# Altium PCB Mach_trai_tim.PcbDoc
Units mil, origin at the board's own origin, x right, y up, seen from the top; angles counter-clockwise.
Board outline 2455 x 2435 mil, 2 copper layers (Top Layer, Bottom Layer); 43 components, 40 nets, 123 pads, 10 vias.
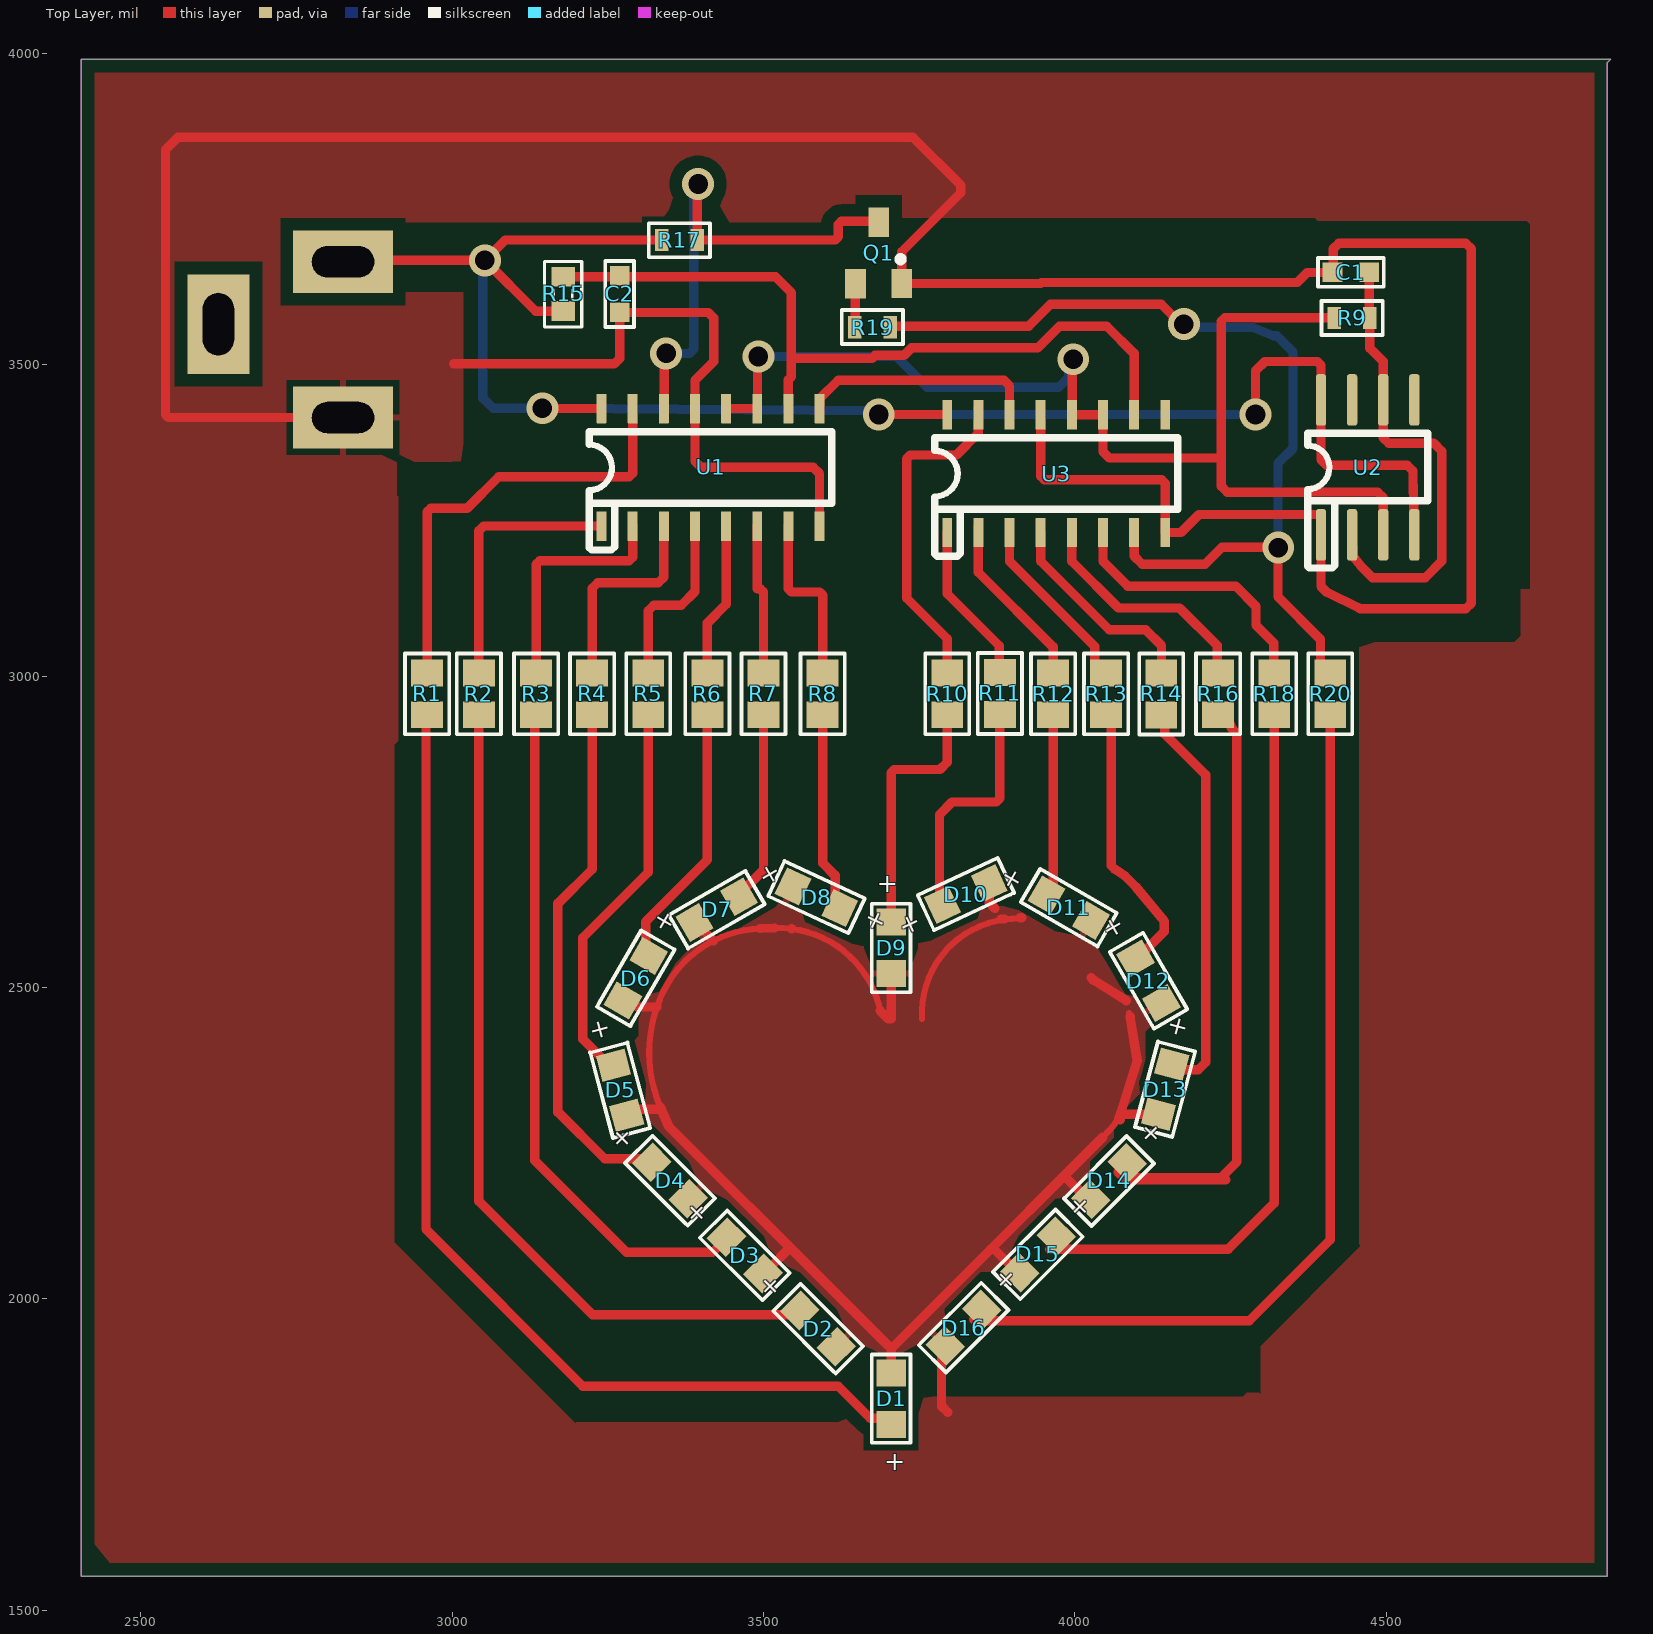
[diagram p0: Top Layer view]
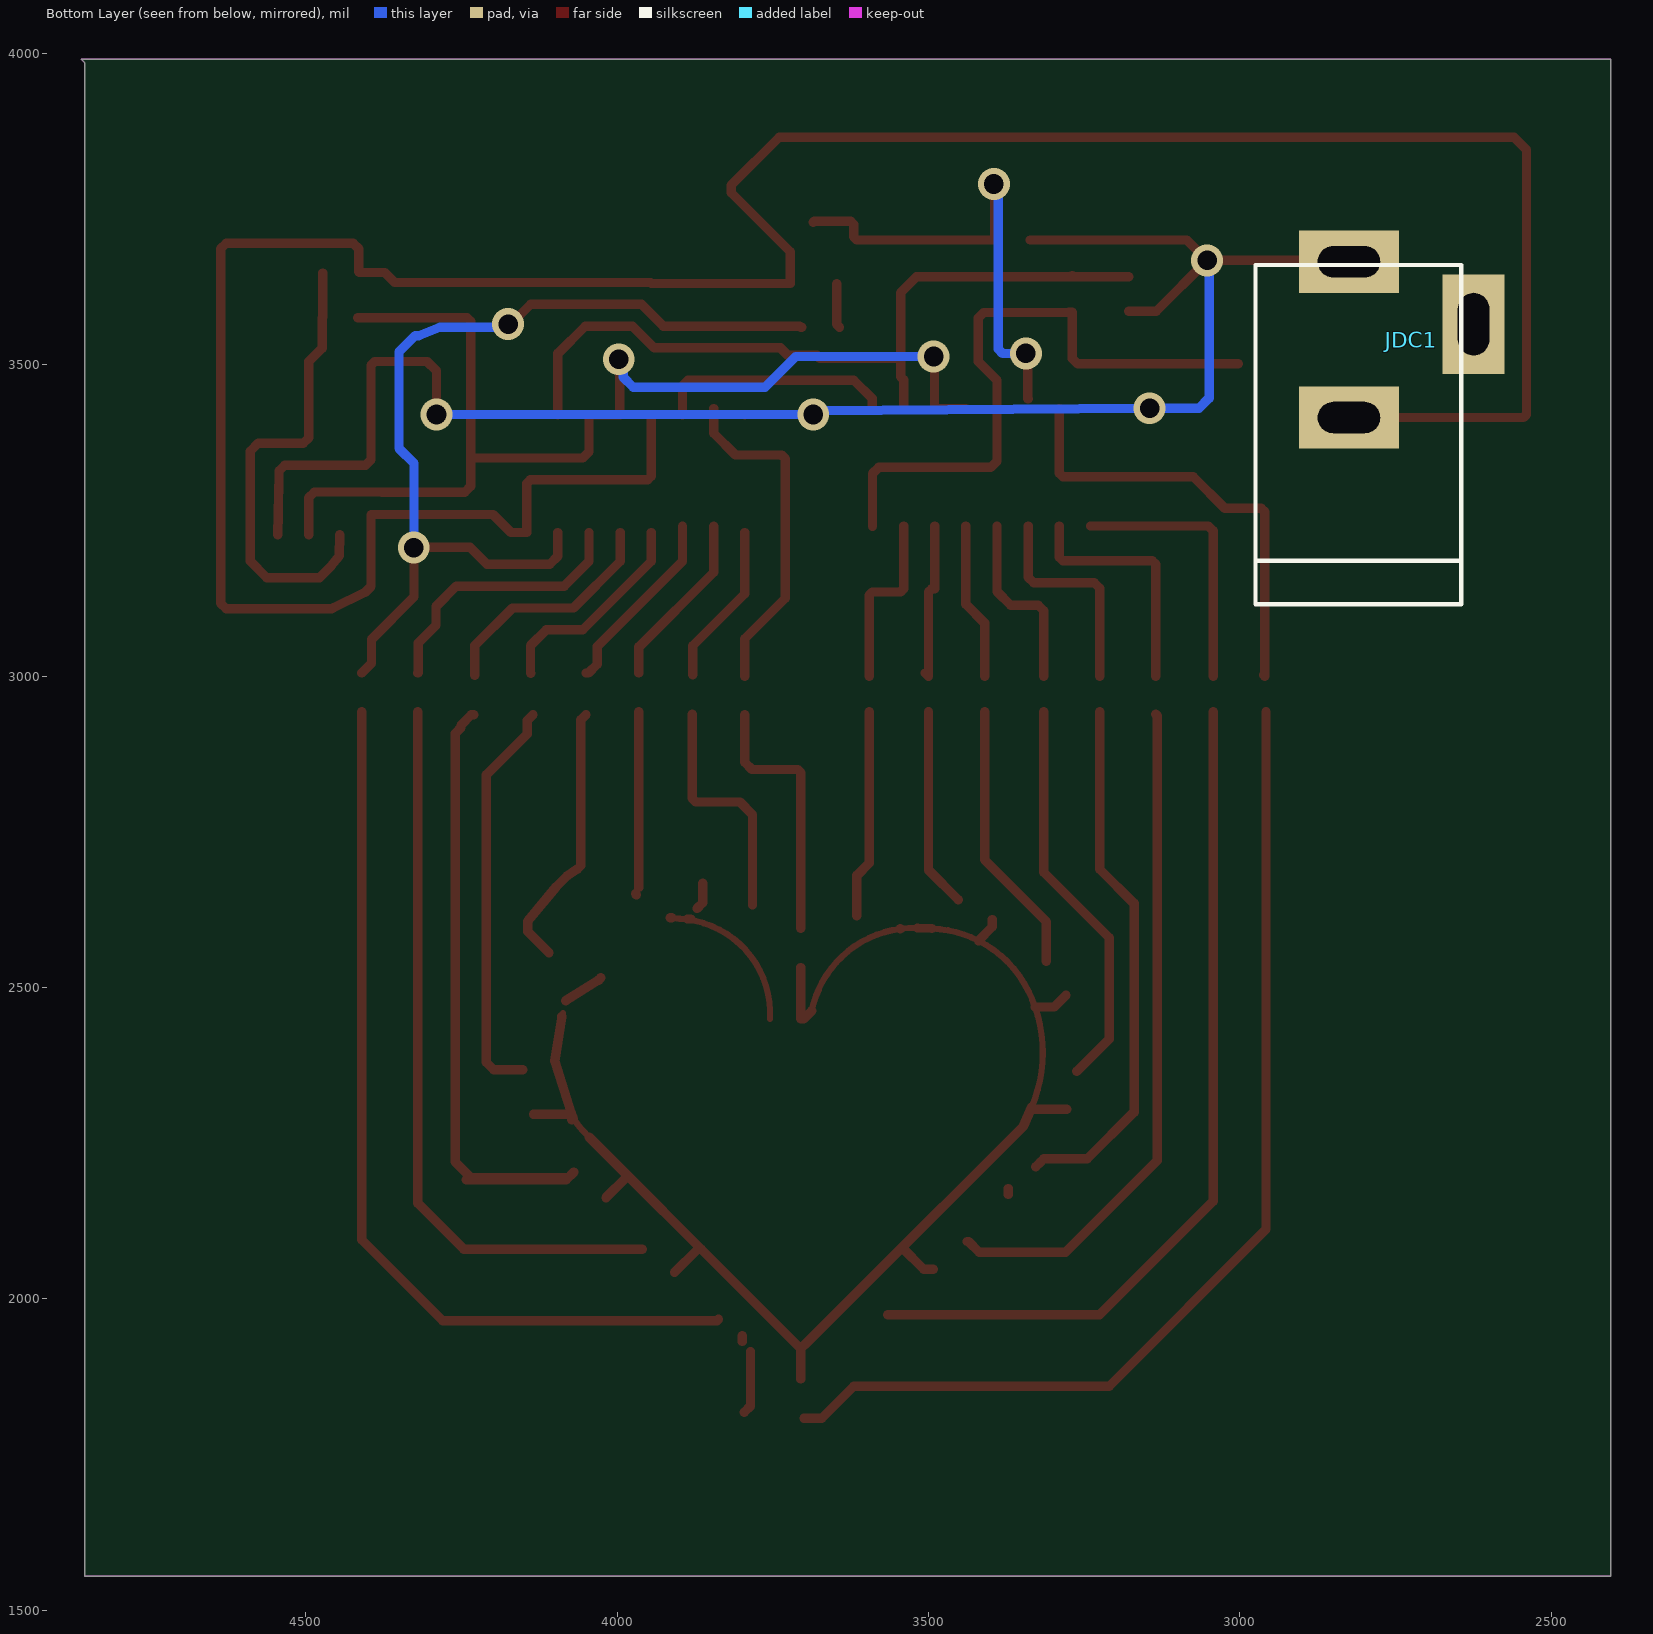
[diagram p1: Bottom Layer view, seen from below]
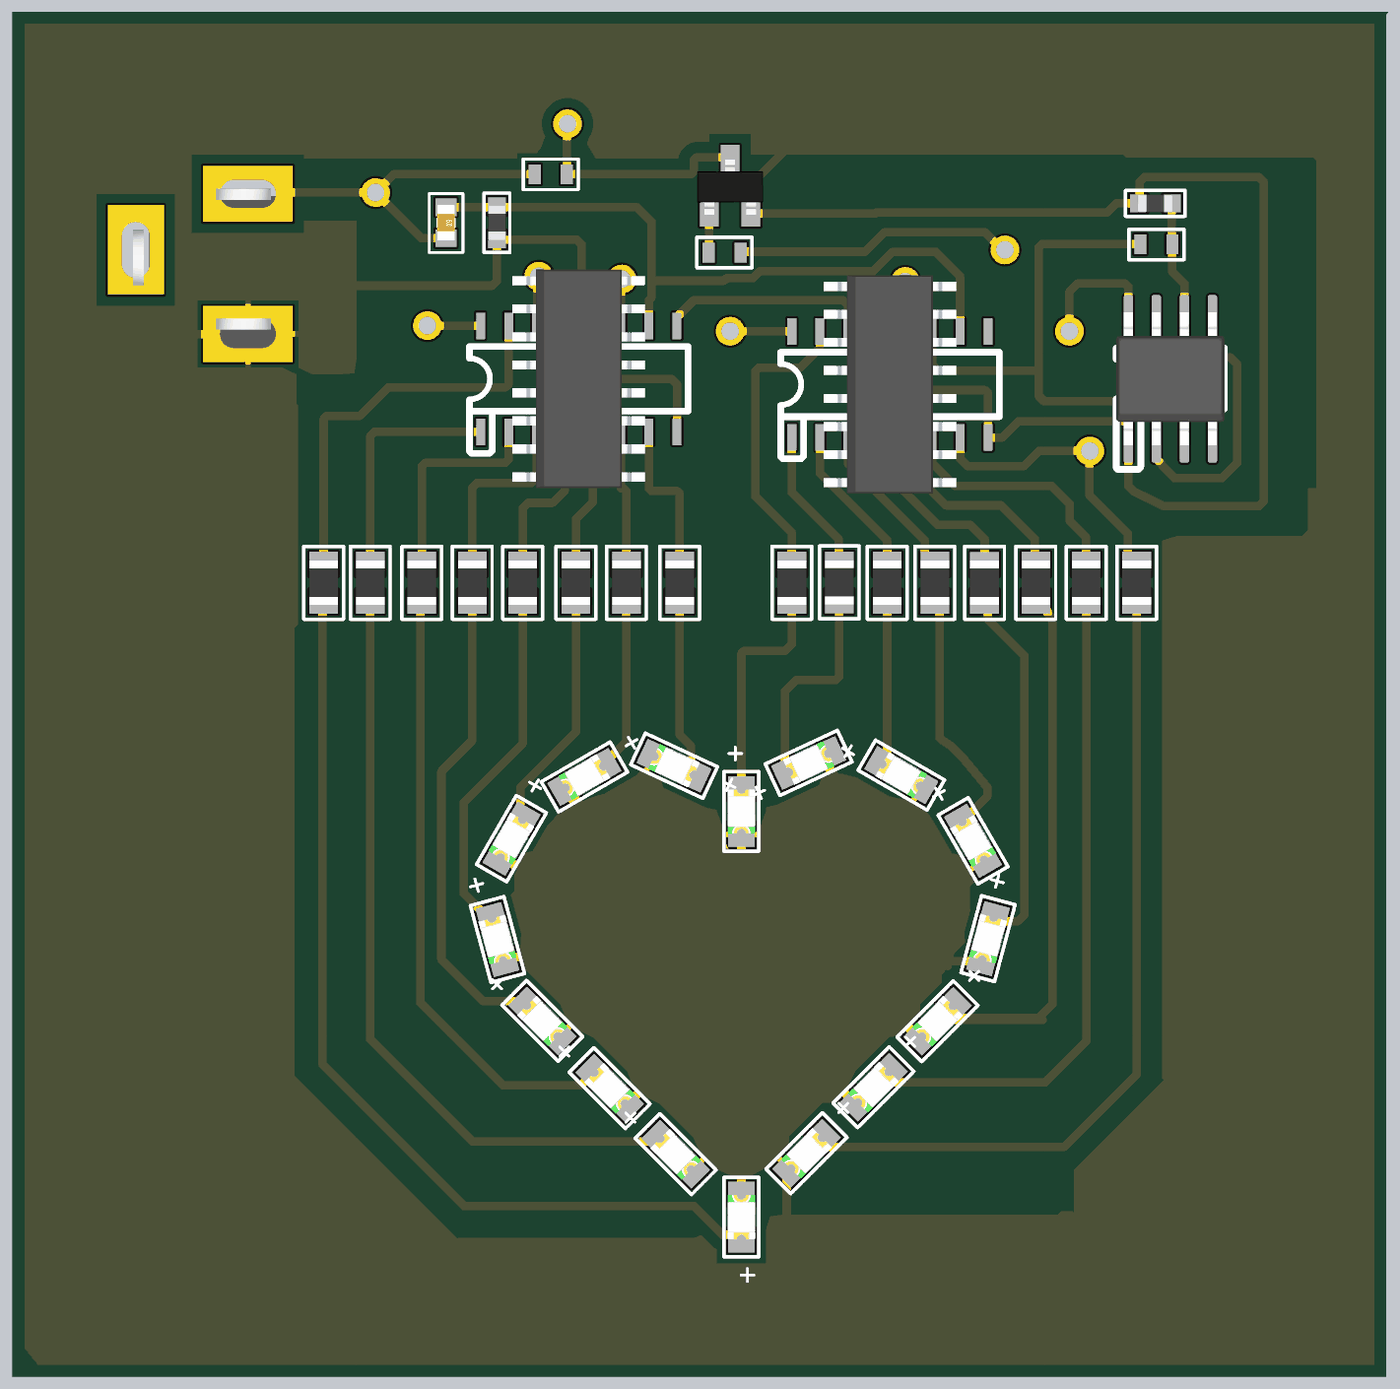
[diagram p2: 3D render of the assembled board from above, using the file's embedded part models]

## Layer stack, top to bottom
Top Solder: solder mask 0.4, Solder Resist, Dk 3.5
Top Layer: signal copper 1.4
Dielectric 1: dielectric 12.6, FR-4, Dk 4.8
Bottom Layer: signal copper 1.4
Bottom Solder: solder mask 0.4, Solder Resist, Dk 3.5

## Board outline
2405,1555 4855,1555 4855,3985 4860,3990 2405,3990

## Design rules (kind name [scope] priority, off if disabled: settings)
Clearance Clearance_1 [All] p1: gap=20 ignorepadtopadclearanceinfootprint=FALSE
Clearance [All] p2: gap=10 ignorepadtopadclearanceinfootprint=FALSE
PolygonConnect [All] p1: connectstyle=Relief reliefconductorwidth=10 reliefentries=4 polygonreliefangle="90 Angle" airgapwidth=10
RoutingVias [All] p1: holewidth=28 width=50 viastyle="Through Hole" minholewidth=28 minwidth=50 maxholewidth=28 maxwidth=50
SolderMaskExpansion [All] p1: expansion=4 istentingtop=FALSE
SupplyNets "Schematic Supply Nets_1" [InNet('VCC')] p1: voltage=0.000
SupplyNets "Schematic Supply Nets" [InNet('GND')] p2: voltage=0.000
Width [All] p1: maxlimit=50 minlimit=10 preferedwidth=10
30 further rules are at their usual default settings.

## Components (designator, comment, footprint, x,y, rotation, side; value= is the part's Value field where it differs from the comment)
C1 "10 uF, 10 VDC" CAP_0603 4445,3645 r0 top
C2 "1 uF, 25 VDC" CAP_0603 3266.14,3611.42 r270 top
D1 "Green, 3.2V" WL-SMCW_0805 3705,1840 r270 top
D2 "Green, 3.2V" WL-SMCW_0805 3587.73,1952.27 r135 top
D3 "Green, 3.2V" WL-SMCW_0805 3470,2070 r135 top
D4 "Green, 3.2V" WL-SMCW_0805 3350,2190 r135 top
D5 "Green, 3.2V" WL-SMCW_0805 3270,2335 r105 top
D6 "Green, 3.2V" WL-SMCW_0805 3295,2515 r60 top
D7 "Green, 3.2V" WL-SMCW_0805 3425,2625 r30 top
D8 "Green, 3.2V" WL-SMCW_0805 3585,2645 r335 top
D9 "Green, 3.2V" WL-SMCW_0805 3705,2563.5 r90 top
D10 "Green, 3.2V" WL-SMCW_0805 3825,2650 r205 top
D11 "Green, 3.2V" WL-SMCW_0805 3990.16,2628.35 r150 top
D12 "Green, 3.2V" WL-SMCW_0805 4118.11,2511.02 r120 top
D13 "Green, 3.2V" WL-SMCW_0805 4144.88,2336.61 r75 top
D14 "Green, 3.2V" WL-SMCW_0805 4054.72,2189.37 r45 top
D15 "Green, 3.2V" WL-SMCW_0805 3940.55,2071.65 r45 top
D16 "Green, 3.2V" WL-SMCW_0805 3821.26,1953.94 r45 top
JDC1 "Jack DC" DC-IN 2725,3540 r90 bottom value="Jac DC"
Q1 "C1815" SOT23B 3685,3679.21 r0 top
R1 "1 KOhm, 1/8 W" RESISTOR_0805 2960,2971.34 r270 top
R2 "1 KOhm, 1/8 W" RESISTOR_0805 3043.18,2971.34 r270 top
R3 "1 KOhm, 1/8 W" RESISTOR_0805 3135,2971.34 r270 top
R4 "1 KOhm, 1/8 W" RESISTOR_0805 3225,2971.34 r270 top
R5 "1 KOhm, 1/8 W" RESISTOR_0805 3315,2971.34 r270 top
R6 "1 KOhm, 1/8 W" RESISTOR_0805 3410,2971.34 r270 top
R7 "1 KOhm, 1/8 W" RESISTOR_0805 3500,2971.34 r270 top
R8 "1 KOhm, 1/8 W" RESISTOR_0805 3595,2971.34 r270 top
R9 "10 KOhm, 1/4 W" resistor_0603 4445,3575 r180 top
R10 "1 KOhm, 1/8 W" RESISTOR_0805 3795,2971.34 r270 top
R11 "1 KOhm, 1/8 W" RESISTOR_0805 3879.53,2972.05 r270 top
R12 "1 KOhm, 1/8 W" RESISTOR_0805 3965,2971.34 r270 top
R13 "1 KOhm, 1/8 W" RESISTOR_0805 4050,2971.34 r270 top
R14 "1 KOhm, 1/8 W" RESISTOR_0805 4138.58,2971.26 r270 top
R15 "RESISTOR SMD" RES-SM-0603 3178.35,3640.55 r270 top value=1K
R16 "1 KOhm, 1/8 W" RESISTOR_0805 4230,2971.34 r270 top
R17 "1 KOhm, 1/4 W" resistor_0603 3365,3700 r180 top
R18 "1 KOhm, 1/8 W" RESISTOR_0805 4320,2971.34 r270 top
R19 "1 KOhm, 1/4 W" resistor_0603 3675,3560 r0 top
R20 "1 KOhm, 1/8 W" RESISTOR_0805 4410,2971.34 r270 top
U1 "74HC595" 74HC595 3415,3335 r0 top
U2 "NE555" NE555 4470,3335 r0 top
U3 "74HC595" 74HC595 3970,3325 r0 top

## Footprints (in the part's own frame and the unit in brackets; to place one, negate y for a bottom-side part, rotate by r counter-clockwise, add the part's x,y. Pads: shape width x height; smd on the part's side, far side on the other; paste and mask are expansions set on the pad)
74HC595 [mm]
  rrect5% 0.405x1.2 smd: 1(-4.445,-2.4) 2(-3.175,-2.4) 3(-1.905,-2.4) 4(-0.635,-2.4) 5(0.635,-2.4) 6(1.905,-2.4) 7(3.175,-2.4) 8(4.445,-2.4) 9(4.445,2.4) 10(3.175,2.4) 11(1.905,2.4) 12(0.635,2.4) 13(-0.635,2.4) 14(-1.905,2.4) 15(-3.175,2.4) 16(-4.445,2.4)
  silkscreen extent -4.95,-3.37 4.95,1.46, body extent -4.95,-3 4.95,3, height 1.75
CAP_0603 [mm]
  rect 0.8x0.8 smd: 1(-0.801,0.076) 2(0.699,0.076)
  silkscreen extent -1.4,-0.51 1.3,0.66, body extent -0.85,-0.32 0.75,0.48, height 0.8
DC-IN [mil] "Jac DC input"
  rect 100x160 hole 50 slot 100 at 90 deg: 1(125,100) 2(-125,100)
  rect 160x100 hole 50 slot 100 at 0 deg: 3(25,-100)
  silkscreen extent -425,-80 120,250, body extent -410,-105 134,269, height 434
NE555 [mm]
  rrect50% 0.42x2.1 smd mask+0.1: 1(-1.905,-2.75) 1(-1.905,-2.75) 2(-0.635,-2.75) 3(0.635,-2.75) 4(1.905,-2.75) 5(1.905,2.75) 6(0.635,2.75) 7(-0.635,2.75) 8(-1.905,2.75)
  silkscreen extent -2.45,-4.1 2.45,1.39, body extent -2.45,-3.01 2.45,3.01, height 1.63
RES-SM-0603 [mm]
  rect 0.8x0.95 smd: 1(-0.014,0) 2(1.386,0)
  silkscreen extent -0.64,-0.76 2.03,0.76, body extent -0.11,-0.4 1.49,0.4, height 0.3
resistor_0603 [mm]
  rect 0.55x0.9 smd: 1(-0.725,0) 2(0.725,0)
  silkscreen extent -1.25,-0.69 1.24,0.7, body extent -0.8,-0.45 0.8,0.45, height 0.5
RESISTOR_0805 [mm] "Chip Resistor, 2-Leads, Body 2,00x1,20mm, IPC Medium Density"
  rect 1.1x1.3 smd: 1(-0.85,0) 2(0.85,0)
  silkscreen extent -1.65,-0.9 1.65,0.9, body extent -1,-0.65 1,0.65, height 0.45
SOT23B [mm] "SOT 23B"
  rect 0.85x1.2 smd: 1(0.94,-1.245) 2(0,1.25) 3(-0.95,-1.25)
  silkscreen extent 0.77,-0.38 1.02,-0.13, body extent -1.5,-1.3 1.5,1.2, height 1.06
WL-SMCW_0805 [mm] "SMD Mono-color Chip LED, body 2.0x1.25mm"
  rect 1.1x1.2 smd: 1(-1.05,0) 2(1.05,0)
  silkscreen extent -1.8,-0.79 1.8,0.79, body extent -1,-0.63 1,0.62, height 0.7

## Part data
C1: library part 0106031061010, "CAP, size 0603, 10 uF, 10 VDC", Capacitance="10 uF", Manufacture Name="Samsung Electro-Mechanics", Manufacture SN=CL10A106KP8NNWC, Operating Temperature="-55 to +125degC", Tolerance=+/-10%, Voltage Rating DC="10 VDC", ComponentLink2Description=Datasheet, ComponentLink2URL=https://www.mouser.vn/datasheet/2/585/MLCC-1837944.pdf, Mounting Technology=SMT, Packaging="Tape and Reel", Size=0603, Supplier 1 Name=Mouser, Supplier 1 SN=187-CL10A106KP8NNWC, Supplier 1 URL=https://www.mouser.vn/ProductDetail/Samsung-Electro-Mechanics/CL10A106KP8NNWC?qs=xZ%2FP%252Ba9zWqZx8LSX23YqWA%3D%3D&utm_source=mouser-refine-download&utm_medium=file&utm_campaign=CL10A106KP8NNWC&utm_content=Samsung-Electro-Mechanics, Supplier 2 Name=Digi-Key, Supplier 2 SN=1276-CL10A106KP8NNWCTR-ND, Supplier 2 URL=https://www.digikey.com/en/products/detail/samsung-electro-mechanics/cl10a106kp8nnwc/16572907, Supplier 3 Name=thegioiic, Supplier 3 SN=N/A, Supplier 3 URL=https://www.thegioiic.com/tu-gom-0603-10uf-25v
C2: library part 0106031051025, "CAP, size 0603, 1 uF, 25 VDC", Capacitance="1 uF", Manufacture Name="Samsung Electro-Mechanics", Manufacture SN=CL10A105KA8NNNC, Operating Temperature="-55 to +125degC", Tolerance=+/-10%, Voltage Rating DC="25 VDC", ComponentLink2Description=Datasheet, ComponentLink2URL=https://www.mouser.vn/datasheet/2/585/MLCC-1837944.pdf, Mounting Technology=SMT, Packaging="Tape and Reel", Size=0603, Supplier 1 Name=Mouser, Supplier 1 SN=187-CL10A105KA8NNNC, Supplier 1 URL=https://www.mouser.vn/ProductDetail/Samsung-Electro-Mechanics/CL10A105KA8NNNC?qs=hqM3L16%252BxldY%252BnK4KzDJVg%3D%3D&utm_source=mouser-refine-download&utm_medium=file&utm_campaign=CL10A105KA8NNNC&utm_content=Samsung-Electro-Mechanics, Supplier 2 Name=Digi-Key, Supplier 2 SN=1276-1102-2-ND, Supplier 2 URL=https://www.digikey.com/en/products/detail/samsung-electro-mechanics/cl10a105ka8nnnc/3886760, Supplier 3 Name=thegioiic, Supplier 3 SN=N/A, Supplier 3 URL=N/A
D1 D2 D3 D4 D5 D6 D7 D8 D9 D10 D11 D12 D13 D14 D15 D16: library part 160805GreenClear, "WL-SMCW SMT Mono-color Chip LED Waterclear, size 0805, Green, 3.2V, 140deg", Color=Green, ComponentLink1Description="Datasheet link", ComponentLink1URL=N/A, ComponentLink2Description="Supplier 1 URL", ComponentLink2URL=https://www.mouser.vn/ProductDetail/Wurth-Elektronik/150080VS75000?qs=LlUlMxKIyB0tGHJmO6%252B0ug%3D%3D, ComponentLink3Description="Supplier 2 URL", ComponentLink3URL=https://www.digikey.com/en/products/detail/liteon/LTST-C171GKT/386793, ComponentLink4Description="Supplier 3 URL", ComponentLink4URL=https://www.thegioiic.com/led-xanh-la-0805-dan-smd-trong-suot, Size=0603, Supplier 1 Name=Mouser, Supplier 1 SN=710-150080VS75000, Supplier 1 URL=https://www.mouser.vn/ProductDetail/Wurth-Elektronik/150080VS75000?qs=LlUlMxKIyB0tGHJmO6%252B0ug%3D%3D, Supplier 2 Name=Digi-Key, Supplier 2 SN=160-1423-2-ND, Supplier 2 URL=https://www.digikey.com/en/products/detail/liteon/LTST-C171GKT/386793, Supplier 3 Name=ICDayRoi, Supplier 3 SN=N/A, Supplier 3 URL=https://www.thegioiic.com/led-xanh-la-0805-dan-smd-trong-suot, Type=Clear
JDC1: "Jack DC input"
Q1: "NPN Bipolar Transistor"
R1 R2 R3 R4 R5 R6 R7 R8 R10 R11 R12 R13 R14 R16 R18 R20: library part 0008051021, "RES, size 0805, 1 KOhm, 1/8 W", Manufacture  Name="Vishay Dale", Manufacture  SN=M55342K06B1E00RS3, Rated Power="1/8 W", Resistance="1 KOhm", Resistance Tolerance=+/-1%, ComponentLink1Description="Datasheet link", ComponentLink1URL=https://www.vishay.com/docs/31010/rcwpm.pdf, ComponentLink2Description="Supplier 1 URL", ComponentLink2URL=N/A, ComponentLink3Description="Supplier 2 URL", ComponentLink3URL=https://www.digikey.com/en/products/detail/vishay-dale/M55342K06B1E00RS3/2941798, ComponentLink4Description="Supplier 3 URL", ComponentLink4URL=https://www.thegioiic.com/dien-tro-1-kohm-0805-1, Mounting Technology=SMT, Size=0805, Supplier 1 Name=Mouser, Supplier 1 SN=N/A, Supplier 1 URL=N/A, Supplier 2 Name=Digi-Key, Supplier 2 SN=1135-1001-2-ND, Supplier 2 URL=https://www.digikey.com/en/products/detail/vishay-dale/M55342K06B1E00RS3/2941798, Supplier 3 Name=Thegioiic, Supplier 3 SN=N/A, Supplier 3 URL=https://www.thegioiic.com/dien-tro-1-kohm-0805-1
R9: library part 0006031031, "RES, size 0603, 10 KOhm, 1/4 W", Manufacture  Name=OEM, Rated Power="1/4 W", Resistance="10 KOhm", Resistance Tolerance=+/-1%, ComponentLink1Description="Datasheet link", ComponentLink1URL=https://fscdn.rohm.com/en/products/databook/datasheet/passive/resistor/chip_resistor/esr-e.pdf, ComponentLink2Description="Supplier 1 URL", ComponentLink2URL=N/A, ComponentLink3Description="Supplier 2 URL", ComponentLink3URL=https://www.digikey.com/en/products/detail/rohm-semiconductor/ESR03EZPF1002/1983429, ComponentLink4Description="Supplier 3 URL", ComponentLink4URL=N/A, Manufacture  SN=OEM, Mounting Technology=SMT, Size=0603, Supplier 1 Name=Mouser, Supplier 1 SN=755-ESR03EZPF1002, Supplier 1 URL=https://www.mouser.vn/ProductDetail/ROHM-Semiconductor/ESR03EZPF1002?qs=sGAEpiMZZMvdGkrng054t67Efho1F8r6CDeAsqwFse8%3D, Supplier 2 Name=Digi-Key, Supplier 2 SN="RHM10KADTR-ND RHM10KADCT-ND RHM10KADDKR-ND", Supplier 2 URL=https://www.digikey.com/en/products/detail/rohm-semiconductor/ESR03EZPF1002/1983429, Supplier 3 Name=thegioiic, Supplier 3 SN=N/A, Supplier 3 URL=N/A
R15: "Resistor"
R17 R19: library part 0006031025, "RES, size 0603, 1 KOhm, 1/4 W", Manufacture  Name=Panasonic, Manufacture  SN=ERJ-UP3J102V, Rated Power="1/4 W", Resistance="1 KOhm", Resistance Tolerance=+/-5%, ComponentLink1Description="Datasheet link", ComponentLink1URL=https://www.mouser.vn/datasheet/2/315/Panasonic_Resistors_Thick_Film_Anti_Sulf_Anti_Surg-1825099.pdf, ComponentLink2Description="Supplier 1 URL", ComponentLink2URL=N/A, ComponentLink3Description="Supplier 2 URL", ComponentLink3URL=https://www.mouser.vn/ProductDetail/Panasonic/ERJ-UP3J102V?qs=GedFDFLaBXG0ASpYP%252B3phQ%3D%3D, ComponentLink4Description="Supplier 3 URL", ComponentLink4URL=N/A, Mounting Technology=SMT, Size=0603, Supplier 1 Name=Mouser, Supplier 1 SN=667-ERJ-UP3J102V, Supplier 1 URL=https://www.mouser.vn/ProductDetail/Panasonic/ERJ-UP3J102V?qs=GedFDFLaBXG0ASpYP%252B3phQ%3D%3D, Supplier 2 Name=Digi-Key, Supplier 2 SN=667-ERJ-UP3J102V, Supplier 2 URL=https://www.mouser.vn/ProductDetail/Panasonic/ERJ-UP3J102V?qs=GedFDFLaBXG0ASpYP%252B3phQ%3D%3D, Supplier 3 Name=thegioiic, Supplier 3 SN=N/A, Supplier 3 URL=N/A

## Via types
v1: diameter 51.18, hole 31.5, Top Layer to Bottom Layer, 10 vias

## Nets (pads, with @x,y where several pads share a name; then routed paths per layer and width w, separated by ;. In a path a pad name is that pad's centre, name@x,y a point inside that pad or via, vN(x,y) a via of type N, cw(c..) or ccw(c..) an arc to the next point about the centre after c; other vN are vias at no path point)
GND: C1.1 C2.2 D1.1 D2.1 D3.1 D4.1 D5.1 D6.1 D7.1 D8.1 D9.1 D10.1 D11.1 D12.1 D13.1 D14.1 D15.1 D16.1 JDC1.2 Q1.1 U1.8 U1.13 U2.1 U3.8 U3.13 | length 8740.7
  Top Layer w10: 3334.65,2307.5 cw(c3540.26,2395.41) 3328.97,2468.62 cw(c3540.26,2395.41) 3339.19,2493.25 cw(c3501.44,2414.3) 3419.87,2575.25 cw(c3501.44,2414.3) 3494.68,2594.62 ; 3517.69,2595.47 cw(c3523.88,2428.33) 3545.55,2594.18 cw(c3523.88,2428.33) 3664.14,2519.44 cw(c3523.88,2428.33) 3687.61,2462.47 ; 3754.58,2449.31 cw(c3906.43,2458.14) 3886.98,2609.01 cw(c3980.44,1884.08) 3911.92,2611.79 cw(c3980.44,1884.08) 3912.39,2611.83 ; 4045.6,2260.52 ccw(c3906.32,2402.96) 4071.06,2290.93 ccw(c3906.32,2402.96) 4075.69,2298.06 ; 4086.8,2458.52 cw(c3870,2367.45) 4088.42,2454.57
  Top Layer w15: JDC1.2 2545,3415 2540,3420 2540,3845 2560,3865 3739.83,3865 3816.62,3788.21 3816.62,3775.78 3722,3681.16 Q1.1 3944.72,3630.21 3946.26,3631.75 4356.75,3631.75 4373,3648 C1.1 4415,3649.53 4415,3686.21 4423.79,3695 4627.43,3695 4636.22,3686.21 4636.22,3116.69 4627.43,3107.9 4461.93,3107.9 4458.45,3107.9 4455.33,3109.43 4404.72,3134.25 4395,3143.98 4395,3150.19 4395,3258.62 4394.23,3259.39 4199.15,3259.39 4170.28,3230.51 U3.8 4145,3309.14 4139.14,3315 3950.86,3315 3945,3320.86 U3.13 ; 3002.76,3501.18 3260.63,3501.18 3269.14,3509.69 C2.2 3275.13,3583.89 C2.2@3277.71,3583.62 ; C2.2@3277.75,3583.59 3411.21,3583.59 3420,3574.8 3420,3505 3390,3475 U1.13 3390,3345 3400,3335 3580,3335 3590,3325 U1.8 ; D5.1@3278.15,2304.58 3331.73,2304.58 3334.65,2307.5 3347.47,2277.53 3348.83,2276.16 3409.86,2215.14 3542.5,2082.5 ; D6.1@3279.25,2487.72 3298.35,2468.62 3328.97,2468.62 ; D4.1@3372.27,2167.73 D4.1@3372.27,2177.27 ; D7.1@3397.72,2609.25 3397.72,2597.4 3419.87,2575.25 ; D3.1@3492.27,2047.73 3507.73,2047.73 3542.5,2082.5 ; 3494.68,2594.62 3517.69,2595.47 ; 3687.61,2462.47 3700.08,2450 3705,2450 D9.1 D9.1@3705,2532.01 ; D1.1@3705,1871.5 D1.1 3705,1919.92 3865.04,2079.96 ; 3705,1920 3695,1930 3542.5,2082.5 ; D16.1@3785.77,1915.77 3785.77,1828.01 3795.67,1818.11 ; D16.1@3798.99,1931.67 D16.1@3798.99,1941.21 ; D10.1 3862.47,2635.96 3871.65,2626.77 ; 3881.86,2610 3886.86,2610 ; D15.1@3907.73,2042.73 3870.5,2079.96 3865.04,2079.96 ; 3912.39,2611.83 3914.43,2611.83 ; D14.1@4017.73,2162.73 3985.04,2195.42 3985.04,2199.96 ; 4025.96,2515.59 4029.69,2511.86 4082.47,2478.77 ; 4044.9,2259.81 3985.04,2199.96 ; 4070.57,2289.4 4071.06,2290.93 ; 4071.42,2288.87 4072.66,2287.63 ; 4088.58,2453.58 4100.05,2382.03 4099.74,2381.07 4073.54,2298.74 4071.06,2290.93 ; D13.1 4076.81,2296.68 4071.06,2290.93 ; 3865.04,2079.96 3985.04,2199.96
NetC1_2: C1.2 R9.1 U2.2 U2.6 | length 756.7
  Top Layer w15: U2.2 4445.77,3192.89 4459.23,3176.42 4477.76,3157.89 4562.24,3157.89 4588.98,3184.64 4588.98,3294.88 4588.98,3360.9 4576.29,3373.58 4503.79,3373.58 4495,3382.37 4495,3505 4473.54,3526.46 R9.1 4472.47,3576.07 C1.2@4472.47,3647
NetC2_1: C2.1 R15.1 U1.10 U3.10 | length 1254.2
  Top Layer w15: R15.1 3267.31,3641.11 C2.1 ; C2.1@3269.14,3640.94 3519.32,3640.94 3544.82,3615.45 3544.82,3510.49 ; U1.10 3540,3475.64 3544.82,3480.46 3544.82,3510.49 ; U3.10 4095,3518.01 4051.26,3561.75 3975.25,3561.75 3940.3,3526.8 3737.78,3526.8 3725.76,3514.78 3678.96,3514.78 3674.17,3510 3545.32,3510 3544.82,3510.49
NetD1_2: D1.2 R1.2 | length 1698.4
  Top Layer w15: R1.2@2958.18,2942.8 2958.18,2111.82 3210,1860 3620,1860 3671.5,1808.5 D1.2@3700,1808.5
NetD2_2: D2.2 R2.2 | length 1383.8
  Top Layer w15: R2.2@3043.18,2942.8 R2.2 3043.18,2156.82 3225.46,1974.54 D2.2@3565.46,1974.54
NetD3_2: D3.2 R3.2 | length 1090.5
  Top Layer w15: R3.2@3135,2938.62 3132.72,2936.34 3132.72,2222.28 3280,2075 3418.66,2075 3435.94,2092.27 D3.2@3437.81,2092.27
NetD4_2: D4.2 R4.2 | length 859.6
  Top Layer w15: R4.2@3225,2942.8 R4.2 3225,2690 3170,2635 3170,2300 3245,2225 3315,2225 D4.2 D4.2@3327.73,2212.27
NetD5_2: D5.2 R5.2 | length 642.3
  Top Layer w15: D5.2@3261.85,2365.42 3210,2417.27 3210,2580 3315,2685 R5.2 R5.2@3315,2942.8
NetD6_2: D6.2 R6.2 | length 441.6
  Top Layer w15: D6.2@3310.75,2542.28 3310.75,2605.75 3410,2705 R6.2 R6.2@3410,2942.8
NetD7_2: D7.2 R7.2 | length 321.8
  Top Layer w15: D7.2@3452.28,2640.75 3500,2688.47 R7.2 R7.2@3500,2942.8
NetD8_2: D8.2 R8.2 | length 336.1
  Top Layer w15: R8.2@3595,2942.8 R8.2 3595,2700 3615,2680 D8.2@3615,2615
NetD9_2: D9.2 R10.2 | length 423.1
  Top Layer w15: D9.2@3705,2595 D9.2 3705,2845 3710,2850 3783.31,2850 3795,2861.69 R10.2
NetD10_2: D10.2 R11.2 | length 387.8
  Top Layer w15: D10.2@3782.53,2632.53 3782.53,2777.53 3802.76,2797.76 3873.67,2797.76 3879.53,2803.61 R11.2
NetD11_2: D11.2 R12.2 | length 284.4
  Top Layer w15: D11.2@3965,2660.67 R12.2 R12.2@3965,2942.8 ; D11.2@3968.79,2648.66 D11.2@3970.39,2650.26
NetD12_2: D12.2 R13.2 | length 434.4
  Top Layer w15: R13.2 4058.27,2929.61 4058.27,2695.87 4064.13,2690.02 4080.14,2679.43 4097.71,2661.86 4143.48,2606.52 4143.48,2589.95 D12.2@4109.33,2555.8
NetD13_2: D13.2 R14.2 | length 652.3
  Top Layer w15: R14.2@4135,2937.87 4144.26,2928.61 4144.26,2907.08 4210,2841.34 4210,2380 4197.88,2367.88 D13.2@4151.64,2367.88
NetD14_2: D14.2 R16.2 | length 1102.5
  Top Layer w15: D14.2@4069.36,2203.73 4081.63,2191.46 4242.09,2191.46 ; D14.2@4078.26,2195 4235,2195 4260,2220 4260,2907.87 4250.59,2917.28 4250.59,2921.22 4233.94,2937.87 R16.2
NetD15_2: D15.2 R18.2 | length 1180
  Top Layer w15: 3959.54,2080 4246.14,2080 4320,2153.86 R18.2@4320,2942.8
NetD16_2: D16.2 R20.2 | length 1475.3
  Top Layer w15: D16.2@3837.27,1967.27 3839.54,1965 4280,1965 4410,2095 R20.2 R20.2@4410,2942.8
NetQ1_2: Q1.2 R17.1 U1.14 | length 796.6
  Top Layer w15: U1.14@3340,3445 3340.47,3445.47 3340.47,3514.77 v1(3343.67,3517.96) ; v1(3395,3790) 3393.54,3788.54 R17.1 3615,3700 3620,3705 3620,3725 3625,3730 3683.43,3730 Q1.2
  Bottom Layer w15: v1@3343.7,3517.93 3381.05,3517.93 3388.12,3525 3388.12,3783.12 v1(3395,3790)
NetQ1_3: Q1.3 R19.1 | length 71.9
  Top Layer w15: R19.1@3642.91,3560 3647.6,3564.68 Q1.3
NetR1_1: R1.1 U1.15 | length 723.7
  Top Layer w15: R1.1@2960,2999.88 R1.1@2961.82,3001.7 ; R1.1@2960,3001.7 2960,3263.28 2965.86,3269.14 3024.14,3269.14 3075,3320 3284.14,3320 3290,3325.86 U1.15
NetR2_1: R2.1 U1.1 | length 433.4
  Top Layer w15: R2.1@3043.18,2999.88 3043.18,3233.18 3051.02,3241.02 U1.1@3240,3241.02
NetR3_1: R3.1 U1.2 | length 389.3
  Top Layer w15: R3.1@3135,2999.88 3135,3179.14 3140.86,3185 3284.14,3185 3290,3190.86 U1.2@3290,3241.02
NetR4_1: R4.1 U1.3 | length 345.8
  Top Layer w15: R4.1@3225,2999.88 3225,3140.82 3233.79,3149.61 3331.21,3149.61 3340,3158.39 U1.3@3340,3241.02
NetR5_1: R5.1 U1.4 | length 298.1
  Top Layer w15: R5.1@3315,2999.88 3315,3104.99 3323.79,3113.78 3367.92,3113.78 3390,3135.86 U1.4@3390,3241.02
NetR6_1: R6.1 U1.5 | length 253.6
  Top Layer w15: R6.1@3410,2999.88 3410,3085.2 3440,3115.2 U1.5@3440,3241.02
NetR7_1: R7.1 U1.6 | length 255.3
  Top Layer w15: U1.6@3490,3241.02 3490,3140 3495,3140 3500,3135 3500,2999.88 R7.1@3505,3004.88
NetR8_1: R8.1 U1.7 | length 290.3
  Top Layer w15: U1.7@3540,3241.02 3540,3140 3545,3135 3590,3135 3595,3130 R8.1@3595,2999.88
NetR9_2: R9.2 U1.11 U1.12 U2.3 U3.11 U3.12 | length 1860.8
  Top Layer w15: U1.12 U1.11 3490.47,3429.96 3490.47,3511.73 v1(3491.73,3512.99) ; v1(3997.24,3508.66) 3995.47,3506.89 3995.47,3419.96 U3.12 U3.11 4045,3360.24 4047.93,3357.31 4055.24,3350 4235,3350 ; R9.2@4416.08,3575.37 4240.86,3575.37 4235,3569.52 4235,3350 ; U2.3 4495,3286.49 4486.21,3295.28 4462.24,3295.57 4377.76,3295.57 4377.47,3295.28 4244.72,3295.28 4235,3305 4235,3350
  Bottom Layer w15: v1(3491.73,3512.99) 3712.98,3512.99 3762.43,3463.54 3973.89,3463.54 3990.32,3479.97 3990.32,3501.74 v1(3997.24,3508.66)
NetR10_1: R10.1 U3.15 | length 547.6
  Top Layer w15: R10.1@3795,2999.88 3795,3060 3730,3125 3730,3349.14 3735.86,3355 3810,3355 3845,3390 U3.15@3845,3429.49
NetR11_1: R11.1 U3.1 | length 262.8
  Top Layer w15: U3.1 3795,3132.06 3878.54,3048.51 R11.1@3878.54,3002.32
NetR12_1: R12.1 U3.2 | length 285.4
  Top Layer w15: U3.2@3845,3240.51 3845,3166.81 3965,3046.81 R12.1
NetR13_1: R13.1 U3.3 | length 302.2
  Top Layer w15: U3.3@3895,3240.51 3895,3184.39 4031.91,3047.48 4031.91,3018.96 4046.06,3004.8 R13.1
NetR14_1: R14.1 U3.4 | length 340.5
  Top Layer w15: U3.4 3945,3184.39 4055,3074.39 4113.46,3074.39 4138.98,3048.88 4138.98,3005.12 R14.1
NetR16_1: R16.1 U3.5 | length 383
  Top Layer w15: U3.5 3995,3184.39 4070,3109.39 4167.91,3109.39 4228.35,3048.96 4228.35,3001.54 R16.1@4228.38,3001.5
NetR18_1: R18.1 U3.6 | length 441
  Top Layer w15: U3.6 4045,3184.39 4085,3144.39 4258.1,3144.39 4290.68,3111.81 4290.68,3081.76 4319.29,3053.15 4319.29,3005.51 R18.1
NetR19_2: R19.2 R20.1 U3.7 | length 1537.4
  Top Layer w15: R19.2 3705.07,3560 3706.87,3561.8 3925.8,3561.8 3960.76,3596.75 4138.74,3596.75 4170.49,3565 v1(4175,3565) ; U3.7 4095,3192.64 4108.26,3179.39 4208.92,3179.39 4236.22,3206.69 4325.98,3206.69 v1(4326.38,3206.3) 4325.98,3205.91 4325.98,3127.17 4394.32,3058.83 4394.32,3020.48 R20.1
  Bottom Layer w15: v1(4175,3565) 4180,3560 4284.6,3560 4318.55,3546.43 4324.28,3546.43 4350,3520.71 4350,3365.48 4325.98,3341.47 4325.98,3206.69 v1(4326.38,3206.3)
NetU1_9: U1.9 U3.14 | length 383.4
  Top Layer w15: U1.9 3590.47,3429.96 3590.47,3445.61 3619.86,3475 3886.21,3475 3895,3466.21 U3.14
VCC: JDC1.1 R15.2 R17.2 U1.16 U2.4 U2.8 U3.16 | length 2955.9
  Top Layer w15: JDC1.1 2827.32,3667.32 v1(3052.76,3667.32) ; v1(3145,3430) 3145.51,3429.49 U1.16 ; R15.2@3178.35,3585.83 3134.25,3585.83 v1(3052.76,3667.32) ; R17.2 3085.43,3700 v1(3052.76,3667.32) ; v1(3685,3420) 3794.49,3420 U3.16 ; v1(4290,3420) 4290,3490 4305,3505 4389.14,3505 4395,3499.14 U2.8 4395,3347.37 4403.79,3338.58 4533.68,3338.58 4542.46,3329.8 4542.79,3323.92 4544.23,3260.57 U2.4
  Bottom Layer w15: v1(3052.76,3667.32) 3049.61,3664.17 3049.61,3446.25 3065.86,3430 v1(3145,3430) 3153.28,3430 3679.14,3425.86 v1(3685,3420) v1(4290,3420)
pads on no net: JDC1.3 U2.5 U2.7 U3.9

## Polygon pours and split planes (outlines as drawn)
GND on Top Layer "GND_L01_P000" (solid, remove dead copper, pour order 0): 2405,3985 4855,3985 4855,1555 2405,1555

## Keep-outs
Keep-Out Layer:
  lines w1.97: 2405,1555 2405,1590 2405,3990 4860,3990 4855,3985 4855,1555 2405,1555

## Other copper
Top Layer:
  pour cut-out: 3015,3345 3012.91,3342.91 2911.81,3342.91 2911.81,3289.37 2914.17,3291.73 2914.17,3296.85 3010,3296.85 3011.11,3295.74 3016.45,3301.08 3016.45,3343.55
  pour cut-out: 4455.59,2896.22 4455.59,2087.72 4458.27,2085.04 4297.64,1924.41 4297.64,1848.03 4295.28,1850.39 4275.59,1850.39 4275.59,1925.98 4437.74,2088.13 4437.74,2896.22
  pour cut-out: 2914.41,2896.22 2908.27,2890.08 2908.27,2091.34 3198.03,1801.57 3199.21,1802.76 3620.47,1802.76 3620.47,1823.48 3607.5,1836.45 3200.25,1836.45 2932.69,2104.01 2932.69,2896.22
  pour cut-out: 3318.9,3337.18 3318.9,3366.06 3350.17,3397.33 3407.45,3397.33 3408.94,3398.82 3699.61,3398.82 3699.61,3334.45 3684.07,3318.92 3337.16,3318.92
  pour cut-out: 3012.22,3294.63 3010,3296.85 2914.17,3296.85 2914.17,3046.69 2914.41,3046.46 2934.51,3046.46 2934.51,3292.66 2932.68,3294.49
  pour cut-out: 4430.26,3126.46 4432.83,3129.04 4432.83,3143 4399.62,3176.21 4380.84,3176.21 4379.06,3178
  pour cut-out: 4344.78,3160.49 4336.7,3152.4 4336.7,3120.06 4351.63,3105.12 4430.26,3105.12 4430.26,3126.46 4404.41,3152.3 4404.41,3171.42 4383.65,3171.42 4376.29,3178.78 4358.4,3160.89
  pour cut-out: 4446.53,3102.94 4446.53,3104.98 4471.06,3129.51 4473.46,3127.11 4602.11,3127.11 4615,3140 4715,3140 4715,3065 4705,3055 4445,3055
  pour cut-out: 4435,3730 4436.78,3728.22 4436.78,3683.75 4508.28,3683.75 4504.37,3679.84 4504.37,3537.28 4536.57,3505.08 4556.68,3505.08 4571.87,3489.89 4570,3488.02 4570,3430 4575,3425 4566.53,3416.53 4566.53,3370.53 4600.49,3336.57 4600.49,3268.53 4620,3249.02 4620,3168.94 4615.48,3164.42 4639.91,3140 4730,3140 4730,3725 4725,3730
  pour cut-out: 4387.72,3674.99 4435.54,3674.99 4435,3675.53 4435,3730 4390,3730 4385,3735 4385,3677.71
  pour cut-out: 3100,3650.92 3100,3651.22 3123.29,3674.51 3211.98,3674.51 3211.98,3673.02 3235,3650 3239.51,3654.51 3239.51,3567.19 3276.12,3530.58 3296.6,3530.58 3296.6,3501.6 3260,3465 3231.39,3465 3224.47,3471.93 3213.21,3460.67 3184.05,3460.67 3181.01,3457.63 3163.64,3475 3126.36,3475 3108.99,3457.63 3108.99,3433.07 3100,3424.08 3139.08,3385 3150,3385 3169,3404 3207.52,3404 3230,3381.52 3230,3353.45 3237.96,3345.49 3236.02,3343.55 3016.45,3343.55 3015,3345 3018.99,3348.99 3018.99,3617.37
  pour cut-out: 3720,3725 3721.73,3723.27 3721.73,3684.8 3722.08,3684.8 3748.73,3658.15 3748.73,3596.59 3763.03,3596.59 3774.13,3585.49 4214.84,3585.49 4230.21,3600.86 4366.93,3600.86 4366.93,3601.46 4387.72,3622.25 4387.72,3727.72 4390,3730 4385,3735 3720,3735
  pour cut-out: 3565.46,2025.1 3542.83,2047.73 3528.68,2047.73 3528.68,2061.87 3507.93,2082.62 3507.93,2062.59 3536.31,2034.21 3536.31,2012.93 3548.97,2012.93 3551.13,2010.77
  pour cut-out: 4133.37,2449.6 4149.51,2449.6 4164.51,2434.6 4164.51,2400.01 4158.97,2400.01 4140.71,2381.75 4133.25,2389.21 4112.87,2389.21 4112.87,2429.1
  pour cut-out: 4094.37,2320.15 4062.27,2288.05 4062.27,2257.83 4077.9,2257.83 4078.15,2257.58 4095.68,2275.11 4095.68,2296.97
  pour cut-out: 4095.68,2318.83 4095.68,2275.11 4078.4,2257.83 4062.27,2257.83 4078.32,2273.88 4078.32,2304.1 4094.37,2320.15
  pour cut-out: 4094.37,2320.15 4094.37,2289.93 4062.27,2257.83
  pour cut-out: 4094.37,2320.15 4096.92,2317.59 4096.92,2276.35 4078.15,2257.58 4062.52,2257.58 4062.27,2257.83 4094.37,2289.93
  pour cut-out: 3952.27,2137.83 3956.41,2137.83 3981.32,2162.73 3989.28,2154.77 3989.28,2132.1 3977.48,2120.3 3969.79,2120.3
  pour cut-out: 3837.27,2017.83 3846.41,2017.83 3871.32,2042.73 3878.36,2035.68 3878.36,2014.36 3865.69,2001.69 3853.41,2001.69 3837.27,2017.83 3862.17,2042.73 3871.32,2042.73
  pour cut-out: 3730.75,1897.24 3756.23,1922.73 3756.32,1922.73 3792.73,1886.32 3750.67,1844.25 3740.75,1844.25 3740.75,1857.89 3730.75,1867.89
  pour cut-out: 3646.41,1930 3635.06,1918.65 3639.41,1914.3 3639.41,1887.73 3643.55,1887.73 3649.25,1882.02 3664.47,1897.24 3679.25,1897.24 3679.25,1903.25 3652.5,1930
  pour cut-out: 3288.68,2452.55 3285.25,2452.55 3280.56,2457.24 3264.99,2441.67 3252.51,2441.67 3252.51,2426.33 3251.61,2425.43 3271.03,2406.01 3283.93,2406.01 3300,2422.08 3300,2450
  pour cut-out: 3168.19,2223.33 3178.07,2233.21 3200.74,2233.21 3234.44,2199.51 3304.08,2199.51 3372.27,2131.32 3408.68,2167.73 3422.83,2167.73 3447.73,2142.83 3405.39,2100.49 3290.56,2100.49 3168.19,2222.86
  pour cut-out: 3755.49,3329.51 3817.81,3329.51 3860.31,3372 3927.05,3372 3940,3384.96 3949.49,3375.47 4002.57,3375.47 4002.57,3371.94 4050,3324.51 4214.51,3324.51 4214.51,3292.19 4239.11,3267.58 4347.96,3267.58 4347.96,3267.31 4376.46,3238.82 4376.29,3238.66 4376.29,3178.78 4358.01,3160.49 4298.59,3160.49 4253.59,3205.49 4164.65,3205.49 4164.65,3256.65 4158.63,3262.67 3785.36,3262.67 3755.49,3292.54
  pour cut-out: 3922.5,2937.35 3912.69,2927.55 3905.49,2927.55 3905.49,2805 3875,2774.51 3820.49,2774.51 3820.49,2686.56 3829.67,2686.56 3845.79,2670.44 3852.88,2677.53 3861,2677.53 3861,2652.62 3882.76,2630.86 3884.57,2632.66 3923.89,2632.66 3923.89,2663.89 3939.51,2679.51 3939.51,2927.55
  pour cut-out: 4255.49,2881.43 4263.66,2881.43 4275,2892.78 4286.34,2881.43 4294.51,2881.43 4294.51,2151.9 4189.44,2046.83 4056.9,2046.83 4026.9,2076.83 4058.84,2108.77 4127.92,2108.77 4170,2150.85 4231.96,2150.85 4245,2163.89 4245,2181.34 4254.63,2181.34 4255.49,2182.2 4255.49,2881.43 4260.09,2881.43 4280,2901.34
  pour cut-out: 4350,2891.34 4374.6,2891.34 4384.51,2881.43 4384.51,2046.9 4269.44,1931.83 4259.93,1941.34 3925,1941.34 3925,1946.34 3920,1951.34 3920,1971.34 3945.56,1971.34 3972.01,1997.79 4212.5,1997.79 4345.49,2130.78 4345.49,2886.83 4360,2901.34 4365,2896.34 4370,2896.34
  pour cut-out: 3315,3326.34 3322.37,3333.71 3659.72,3333.71 3704.51,3288.92 3695,3279.41 3695,3056.34 3725,3056.34 3765,3016.34 3765,2831.34 3690,2831.34 3675,2816.34 3675,2641.34 3665,2641.34 3645,2621.34 3640.49,2621.34 3640.49,2650.85 3620,2671.34 3620.49,2671.83 3620.49,3100.85 3605,3116.34 3580,3116.34 3580,3201.34 3605,3226.34 3590,3241.34 3320,3241.34 3320,3250.99 3313.55,3257.44 3315.49,3259.38 3315.49,3301.05
Multi-Layer:
  pour cut-out: 3757.09,1844.09 4269.29,1844.09 4281.89,1856.69 4281.89,1932.28 3890.94,1932.28 3873.23,1950 3777.56,1854.33 3762.2,1854.33
  pour cut-out: 4165,2285 4165,2270 4160,2265 4160,2245 4165,2245 4195,2215 4225,2215 4235,2225 4235,2305 4215,2325 4205,2325

## Text inside footprints (layer, text, board x,y; h text height)
D1: Top Overlay "+" at 3694,1725 h30
D2: Top Overlay "+" at 3514.19,2041.37 h30 r225
D3: Top Overlay "+" at 3396.46,2159.1 h30 r225
D4: Top Overlay "+" at 3276.46,2279.1 h30 r225
D5: Top Overlay "+" at 3250.86,2448.93 h30 r195
D6: Top Overlay "+" at 3362.03,2609.09 h30 r150
D7: Top Overlay "+" at 3530.09,2672.97 h30 r120
D8: Top Overlay "+" at 3684.58,2586.43 h30 r65
D9: Top Overlay "+" at 3716,2678.5 h30 r180
D10: Top Overlay "+" at 3716.13,2611.37 h30 r295
D11: Top Overlay "+" at 3896.06,2695.37 h30 r240
D12: Top Overlay "+" at 4070.14,2616.12 h30 r210
D13: Top Overlay "+" at 4185.27,2444.85 h30 r165
D14: Top Overlay "+" at 4143.82,2262.91 h30 r135
D15: Top Overlay "+" at 4029.65,2145.19 h30 r135
D16: Top Overlay "+" at 3910.36,2027.48 h30 r135
U1: Mechanical 3 "16" at 3255.16,3370.04 h11.81; Mechanical 3 "9" at 3590.2,3368.46 h11.81; Mechanical 3 "8" at 3590.59,3288.54 h11.81; Mechanical 3 "1" at 3255.94,3293.66 h11.81
U2: Mechanical 3 "1" at 4407.01,3294.05 h11.81; Mechanical 3 "4" at 4541.65,3292.09 h11.81; Mechanical 3 "5" at 4542.83,3365.71 h11.81; Mechanical 3 "8" at 4407.8,3366.5 h11.81
U3: Mechanical 3 "1" at 3810.94,3283.66 h11.81; Mechanical 3 "8" at 4145.59,3278.54 h11.81; Mechanical 3 "9" at 4145.2,3358.46 h11.81; Mechanical 3 "16" at 3810.16,3360.04 h11.81